# Altium PCB TurboSpin.PcbDoc (part 3 of 3)
Units mm, origin at the board's own origin, x right, y up, seen from the top; angles counter-clockwise.
Board outline 70.29 x 70.31 mm, 4 copper layers (Top Layer, GND, Power, Bottom Layer), stack 0.603 mm thick; 151 components, 101 nets, 536 pads, 784 vias.
Unrouted connection lines stored in the file: 8.
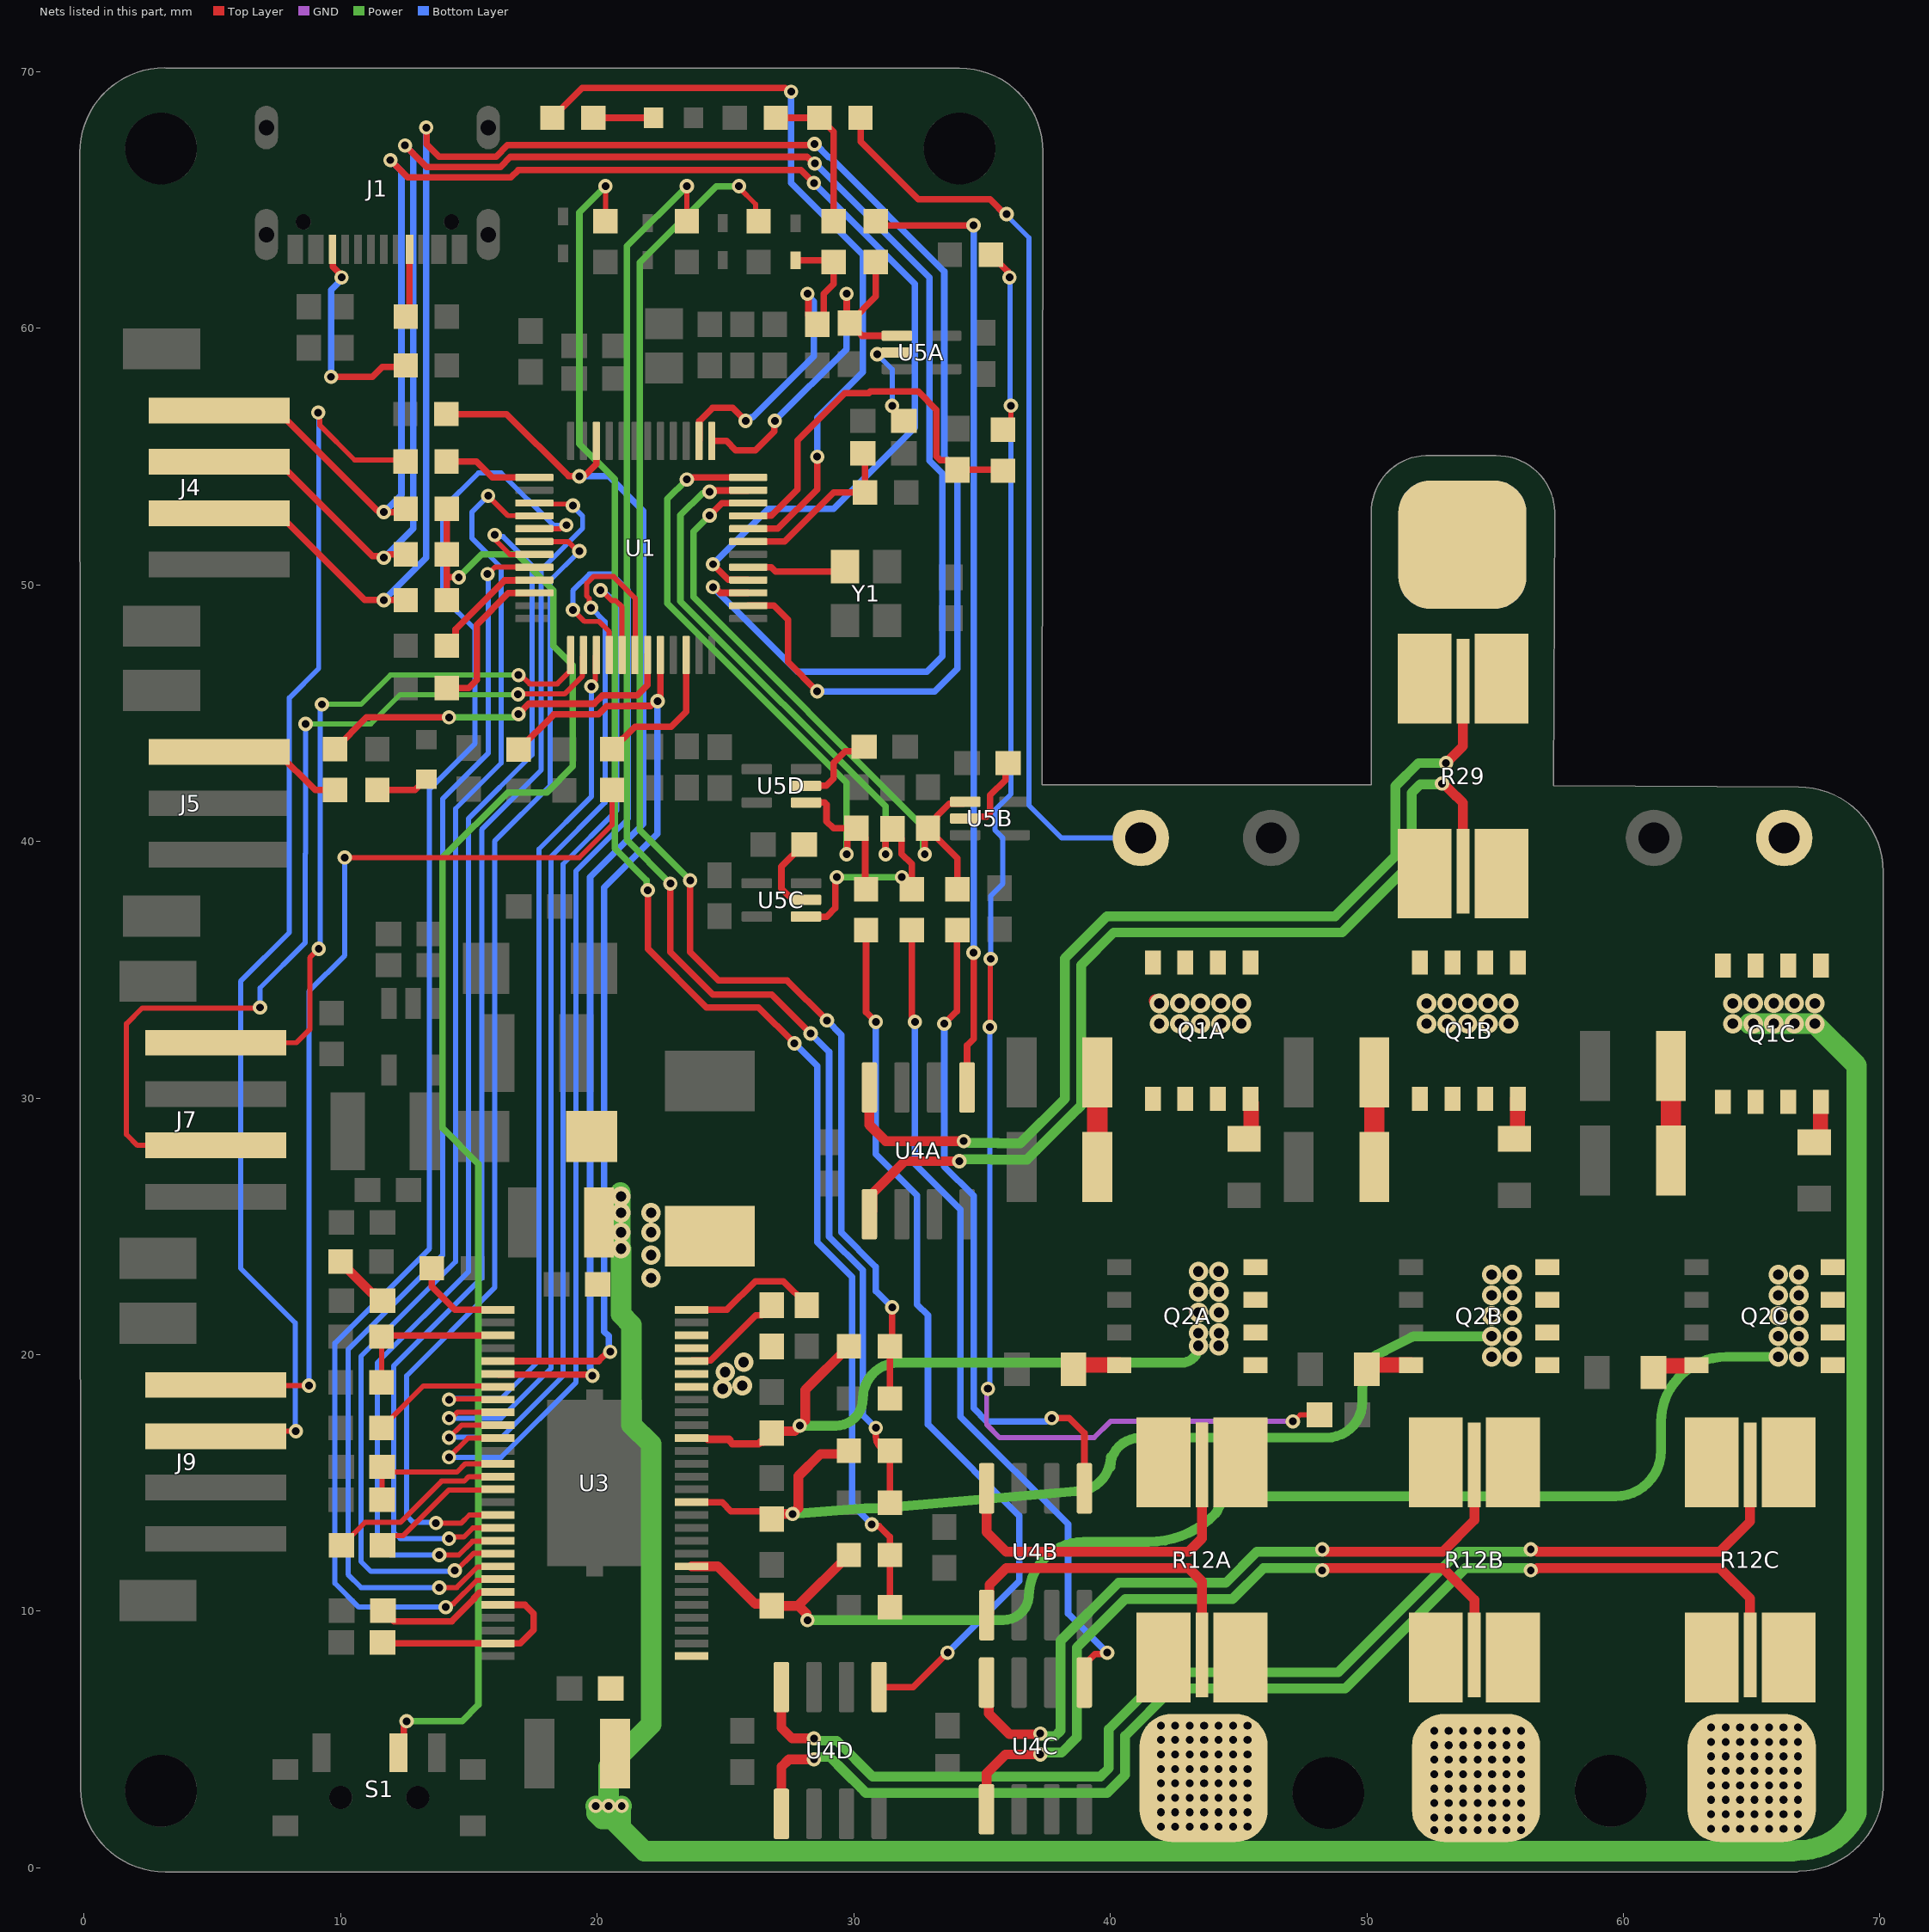
[diagram p4: the nets of this part, all layers, seen from the top]

## Via types
v1: diameter 0.559, hole 0.305, Top Layer to Bottom Layer, tented both sides, 440 vias
v2: diameter 0.56, hole 0.3, Top Layer to Bottom Layer, tented both sides, 254 vias
v3: diameter 0.762, hole 0.406, Top Layer to Bottom Layer, tented both sides, 72 vias
v4: diameter 0.508, hole 0.305, Top Layer to Bottom Layer, tented both sides, 18 vias

## Nets (pads, with @x,y where several pads share a name; then routed paths per layer and width w, separated by ;. In a path a pad name is that pad's centre, name@x,y a point inside that pad or via, vN(x,y) a via of type N, cw(c..) or ccw(c..) an arc to the next point about the centre after c; other vN are vias at no path point) (continued)
HALL_A: J4.2 R5.2 U1.2 | length 77.6
  Top Layer w0.254: J4.2@5.271,52.791 5.644,52.418 7.918,52.418 10.933,49.403 v2(11.684,49.403) R5.2@12.535,49.403 ; v2(13.335,67.818) 13.347,67.806 13.347,67.171 13.829,66.689 16.057,66.689 16.501,67.133 28.426,67.133 v2(28.469,67.177) ; U1.2@25.887,49.185 26.888,49.185 27.432,48.641 27.432,46.99 v2(28.575,45.847)
  Bottom Layer w0.254: v2(11.684,49.403) 13.335,51.054 v2(13.335,67.818) ; v2(28.469,67.177) 28.512,67.177 29.02,66.668 29.076,66.668 33.528,62.216 33.528,54.991 34.036,54.483 34.036,46.736 33.147,45.847 v2(28.575,45.847)
HALL_B: J4.3 R6.2 U1.3 | length 75.4
  Top Layer w0.254: J4.3@5.271,54.791 5.644,54.418 7.936,54.418 11.241,51.113 11.625,51.113 v2(11.684,51.054) ; v2@11.684,51.181 R6.2@12.535,51.181 ; v2(12.509,67.12) 13.346,66.283 16.225,66.283 16.617,66.675 28.177,66.675 28.433,66.419 v2(28.479,66.419) ; v2(24.511,49.911) 24.575,49.911 24.801,49.685 U1.3@25.887,49.685
  Bottom Layer w0.254: v2(11.684,51.054) 12.827,52.197 12.827,66.802 v2(12.509,67.12) ; v2(24.511,49.911) 27.813,46.609 32.846,46.609 33.452,47.215 33.452,54.338 32.952,54.839 32.952,61.975 28.508,66.419 v2(28.479,66.419)
HALL_C: J4.4 R7.2 U1.4 | length 63.1
  Top Layer w0.254: J4.4@5.271,56.791 7.521,56.791 11.421,52.891 11.625,52.891 v2(11.684,52.832) 12.408,52.832 R7.2@12.535,52.959 ; v2(11.938,66.548) 12.609,65.877 16.637,65.877 16.927,66.167 27.94,66.167 v2(28.448,65.659) ; v2(24.511,50.8) 25.113,50.198 25.874,50.198 U1.4@25.887,50.185
  Bottom Layer w0.254: v2(11.684,52.832) 12.37,53.518 12.37,66.116 v2(11.938,66.548) ; v2(24.511,50.8) 26.67,52.959 29.21,52.959 32.385,56.134 32.385,61.722 v2(28.448,65.659)
INA_N: C14A.2 C14B.2 C14C.2 C15A.2 C15B.2 C15C.2 C19.2 C20.2 C32.2 C33.2 C42.1 C43.1 Q1A.5 Q1A.6 Q1A.7 Q1A.8 Q1B.5 Q1B.6 Q1B.7 Q1B.8 Q1C.5 Q1C.6 Q1C.7 Q1C.8 R22A.1 R29.1 U3.29 U3.53 U3.54 U4A.1 | length 196.7
  Top Layer w0.254: R22A.1@30.264,68.199 30.264,67.272 32.512,65.024 35.306,65.024 35.941,64.389 35.957,64.405 v2(35.957,64.445)
  Top Layer w0.381: U4A.1@30.607,25.47 30.716,25.579 30.716,26.265 31.991,27.539 v2(34.116,27.539) ; v2(52.926,42.255) 52.975,42.255 53.456,41.774 53.476,41.774 53.745,41.505 R29.1@53.745,38.845
  Top Layer w0.5: v3@41.747,33.782 41.842,33.686 v3(41.91,33.686)
  Top Layer w0.8: C14A.2@39.492,27.312 C15A.2@39.492,30.995 ; C14B.2@50.292,27.114 C15B.2@50.292,30.797 ; C14C.2@61.849,27.495 C15C.2@61.849,31.178
  Power w0.381: v2(34.116,27.539) 34.15,27.573 34.277,27.573 34.318,27.614 35.353,27.614 35.371,27.597 36.75,27.597 37.122,27.968 38.49,29.337 38.862,29.709 38.862,35.179 40.132,36.449 49.031,36.449 51.748,39.166 51.748,41.89 52.078,42.221 52.892,42.221 v2(52.926,42.255)
  Power w0.8: v2(19.939,2.413) 19.973,2.379 19.973,2.128 20.196,1.905 20.574,1.905 ; v3@20.903,24.13 20.903,24.765 20.903,25.527 v3@20.903,26.323 ; v3(20.925,24.13) 20.925,21.568 21.336,21.157 21.336,17.272 22.098,16.51 22.098,5.588 20.447,3.937 v2(20.447,2.413) 20.481,2.379 20.481,1.998 20.574,1.905 ; v2(20.955,2.413) 20.921,2.379 20.921,1.905 20.921,1.617 20.892,1.587 ; v3@64.9,32.893 v3(67.462,32.893) 69.088,31.267 69.088,2.131 cw(c66.827,3.165) 66.807,0.679 ccw(c66.802,0) 66.583,0.643 21.836,0.643 21.293,1.186 20.892,1.587 ; 20.574,1.905 20.892,1.587
  Bottom Layer w0.2: v2@35.991,64.363 36.83,63.523 36.83,41.402 38.097,40.135 C42.1@41.188,40.135
  other v3: 20.925,24.765 20.925,25.527 20.925,26.162 41.91,32.893 42.71,32.893 43.51,32.893 44.31,32.893 45.11,32.893 52.324,32.893 53.124,32.893 53.924,32.893 54.724,32.893 55.524,32.893 64.262,32.893 65.062,32.893 65.862,32.893 66.662,32.893 42.71,33.693 43.51,33.693 44.31,33.693 45.11,33.686 52.324,33.686 53.124,33.693 53.924,33.693 54.724,33.693 55.524,33.686 64.262,33.686 65.062,33.693 65.862,33.693 66.662,33.693 67.462,33.686
INA_P: J2.1 R29.2 U4A.8 | length 38.6
  Top Layer w0.381: U4A.8@30.607,30.41 30.607,28.956 31.242,28.321 v2(34.29,28.321) ; v2(53.086,43.053) 53.745,43.712 R29.2@53.745,46.245
  Power w0.381: v2(34.29,28.321) 34.324,28.287 34.451,28.287 34.488,28.249 35.616,28.249 35.634,28.232 36.487,28.232 38.227,29.972 38.227,35.442 39.869,37.084 48.768,37.084 51.113,39.429 51.113,42.153 52.013,43.053 v2(53.086,43.053)
INB_N: J6.1 R12A.1 U4B.1 | length 12.9
  Top Layer w0.381: U4B.1@35.179,9.849 35.287,9.957 35.287,11.028 35.941,11.682 43.053,11.682 43.572,11.164 R12A.1@43.572,8.3
  other v1: 41.966,1.601 42.529,1.601 43.093,1.601 43.656,1.601 44.22,1.601 44.783,1.601 45.347,1.601 41.966,2.165 42.529,2.165 43.093,2.165 43.656,2.165 44.22,2.165 44.783,2.165 45.347,2.165 41.966,2.728 42.529,2.728 43.093,2.728 43.656,2.728 44.22,2.728 44.783,2.728 45.347,2.728 41.966,3.292 42.529,3.292 43.093,3.292 43.656,3.292 44.22,3.292 44.783,3.292 45.347,3.292 41.966,3.855 42.529,3.855 43.093,3.855 43.656,3.855 44.22,3.855 44.783,3.855 45.347,3.855 41.966,4.419 42.529,4.419 43.093,4.419 43.656,4.419 44.22,4.419 44.783,4.419 45.347,4.419 41.966,4.982 42.529,4.982 43.093,4.982 43.656,4.982 44.22,4.982 44.783,4.982 45.347,4.982 41.966,5.546 42.529,5.546 43.093,5.546 43.656,5.546 44.22,5.546 44.783,5.546 45.347,5.546
INB_P: C24.2 Q1A.1 Q1A.2 Q1A.3 Q2A.5 Q2A.6 Q2A.7 Q2A.8 R12A.2 R22D.1 U3.46 U4B.8 | length 39.3
  Top Layer w0.254: 25.172,16.663 25.172,16.611 25.26,16.523
  Top Layer w0.3: U3.46@23.679,16.748 24.267,16.748 24.312,16.703 25.133,16.703 25.172,16.663 ; 25.26,16.523 26.296,16.523 26.366,16.592 26.472,16.592 26.797,16.917 C24.2@26.797,16.942
  Top Layer w0.381: C24.2@26.797,16.942 26.873,17.018 27.686,17.018 v2(27.895,17.227) 28.105,17.437 28.105,18.618 R22D.1@29.807,20.32 ; U4B.8@35.179,14.789 35.179,13.079 35.941,12.317 43.053,12.317 43.572,12.836 R12A.2@43.572,15.7
  Power w0.381: v2(27.895,17.227) 29.292,17.227 ccw(c29.292,18.288) 30.353,18.288 cw(c31.75,18.288) 31.75,19.685 42.778,19.685 ccw(c42.778,20.341) v3(43.434,20.341)
  other v3: 44.227,20.341 43.434,20.841 44.234,20.841 43.434,21.641 44.234,21.641 43.434,22.441 44.234,22.441 43.434,23.241 44.227,23.241
INC_N: J8.1 R12B.1 U4C.1 | length 28.5
  Top Layer w0.381: U4C.1@35.176,2.281 35.176,3.68 35.916,4.42 v2(37.272,4.42) ; v2(48.26,11.593) 48.308,11.593 48.398,11.682 52.959,11.682 54.191,10.451 R12B.1@54.191,8.3
  Power w0.381: v2(37.272,4.42) 37.306,4.454 37.433,4.454 37.468,4.49 38.099,4.49 38.695,5.085 38.695,8.587 40.581,10.473 44.763,10.473 45.972,11.682 48.122,11.682 48.212,11.593 v2(48.26,11.593)
  other v1: 52.626,1.474 53.19,1.474 53.753,1.474 54.317,1.474 54.88,1.474 55.444,1.474 56.007,1.474 52.626,1.96 53.19,1.96 53.753,1.96 54.317,1.96 54.88,1.96 55.443,1.96 56.007,1.96 52.626,2.524 53.189,2.524 53.753,2.524 54.316,2.524 54.88,2.524 55.443,2.524 56.007,2.524 52.626,3.087 53.189,3.087 53.753,3.087 54.316,3.087 54.88,3.087 55.443,3.087 56.007,3.087 52.626,3.651 53.189,3.651 53.753,3.651 54.316,3.651 54.88,3.651 55.443,3.651 56.007,3.651 52.626,4.214 53.189,4.214 53.753,4.214 54.316,4.214 54.88,4.214 55.443,4.214 56.007,4.214 52.626,4.778 53.189,4.778 53.753,4.778 54.316,4.778 54.88,4.778 55.443,4.778 56.007,4.778 52.626,5.341 53.189,5.341 53.753,5.341 54.316,5.341 54.88,5.341 55.443,5.341 56.007,5.341
INC_P: C27.2 Q1B.1 Q1B.2 Q1B.3 Q2B.5 Q2B.6 Q2B.7 Q2B.8 R12B.2 R22C.1 U3.41 U4C.8 | length 68.2
  Top Layer w0.254: U3.41@23.679,14.248 24.868,14.248 25.217,13.899 26.512,13.899 26.797,13.614 C27.2@26.797,13.589 C27.2@26.998,13.79 ; R22C.1@29.68,16.129 R22C.1@29.807,16.256
  Top Layer w0.381: C27.2@26.998,13.79 v2(27.618,13.79) 27.841,14.013 27.841,15.268 28.702,16.129 R22C.1@29.68,16.129 ; U4C.8@35.168,7.213 35.259,7.122 35.259,6.016 36.068,5.207 37.245,5.207 v2(37.272,5.234) ; v2(48.26,12.407) 48.308,12.407 48.398,12.317 52.959,12.317 54.191,13.549 R12B.2@54.191,15.7
  Power w0.381: v2(27.618,13.79) 30.446,14.005 30.953,14.005 38.632,14.669 38.733,14.674 ccw(c38.67,16.013) 40.01,16.013 ; v2(37.272,5.234) 37.32,5.234 37.429,5.125 37.836,5.125 38.06,5.348 38.06,8.85 40.318,11.108 44.5,11.108 45.709,12.317 48.122,12.317 48.212,12.407 v2(48.26,12.407) ; 40.005,15.621 cw(c41.133,15.621) 41.133,16.749 41.293,16.749 ; 41.139,16.724 cw(c41.529,14.859) 41.293,16.749 ; 51.829,20.714 52.197,20.714 ; v3(54.864,20.714) 52.197,20.714 ; 41.293,16.749 cw(c41.529,14.859) 41.529,16.764 48.429,16.764 ccw(c48.429,18.156) 49.821,18.156 49.821,18.632 cw(c51.904,18.632) 50.237,19.88 cw(c50.541,19.651) 50.379,19.996 50.682,20.138 ccw(c50.417,20.701) 50.699,20.147 51.731,20.672 cw(c51.904,20.333) 51.904,20.714 52.197,20.714
  other v3: 54.864,19.914 55.657,19.914 55.664,20.714 54.864,21.514 55.664,21.514 54.864,22.314 55.664,22.314 54.864,23.114 55.657,23.114
IND_N: J10.1 R12C.1 U4D.1 | length 47.6
  Top Layer w0.381: U4D.1@27.178,2.102 27.178,3.937 27.47,4.229 v2(28.448,4.229) ; v2(56.388,11.593) 56.422,11.627 56.587,11.627 56.642,11.682 63.754,11.682 64.936,10.5 R12C.1@64.936,8.3
  Power w0.381: v2(28.448,4.229) 28.537,4.318 29.074,4.318 29.65,3.742 30.285,3.107 30.471,2.921 39.878,2.921 40.576,3.62 40.576,5.143 42.418,6.985 49.149,6.985 53.846,11.682 56.25,11.682 56.34,11.593 v2(56.388,11.593)
  other v1: 63.421,1.524 63.985,1.524 64.548,1.524 65.112,1.524 65.675,1.524 66.239,1.524 66.802,1.524 63.421,2.087 63.985,2.087 64.548,2.087 65.112,2.087 65.675,2.087 66.238,2.087 66.802,2.087 63.421,2.651 63.984,2.651 64.548,2.651 65.111,2.651 65.675,2.651 66.238,2.651 66.802,2.651 63.421,3.214 63.984,3.214 64.548,3.214 65.111,3.214 65.675,3.214 66.238,3.214 66.802,3.214 63.421,3.778 63.984,3.778 64.548,3.778 65.111,3.778 65.675,3.778 66.238,3.778 66.802,3.778 63.421,4.341 63.984,4.341 64.548,4.341 65.111,4.341 65.675,4.341 66.238,4.341 66.802,4.341 63.421,4.905 63.984,4.905 64.548,4.905 65.111,4.905 65.675,4.905 66.238,4.905 66.802,4.905 63.421,5.468 63.984,5.468 64.548,5.468 65.111,5.468 65.675,5.468 66.238,5.468 66.802,5.468
IND_P: C29.2 Q1C.1 Q1C.2 Q1C.3 Q2C.5 Q2C.6 Q2C.7 Q2C.8 R12C.2 R22B.1 U3.36 U4D.8 | length 99.4
  Top Layer w0.381: U3.36@23.679,11.748 24.701,11.748 26.162,10.287 26.721,10.287 C29.2@26.797,10.211 27.826,10.211 R22B.1@29.807,12.192 ; U4D.8@27.178,7.042 27.178,5.461 27.597,5.042 v2(28.448,5.042) ; 27.836,10.221 28.16,9.898 28.16,9.686 v2(28.194,9.652) ; v2(56.388,12.407) 56.422,12.373 56.587,12.373 56.642,12.317 63.754,12.317 64.936,13.5 R12C.2@64.936,15.7
  Power w0.381: v2(28.194,9.652) 35.814,9.652 ccw(c35.814,10.668) 36.825,10.566 cw(c38.959,10.566) 38.959,12.7 41.479,12.7 41.486,12.7 ccw(c41.478,16.355) 44.092,13.8 ccw(c43.819,14.066) 44.174,13.929 44.203,14.002 cw(c44.558,13.866) 44.275,14.121 cw(c44.586,13.84) 44.278,14.124 cw(c45.085,13.381) 45.085,14.478 59.69,14.478 ccw(c59.69,16.256) 61.468,16.256 61.468,17.374 cw(c64.008,17.374) 64.008,19.914 v3(66.04,19.914) ; v2(28.448,5.042) 28.537,4.953 29.337,4.953 30.734,3.556 39.615,3.556 39.941,3.883 39.941,5.407 42.155,7.62 48.886,7.62 53.583,12.317 56.25,12.317 56.34,12.407 v2(56.388,12.407)
  other v3: 66.833,19.914 66.04,20.714 66.84,20.714 66.04,21.514 66.84,21.514 66.04,22.314 66.84,22.314 66.04,23.114 66.833,23.114
INH_A: U1.30 U3.17 | length 46.1
  Top Layer w0.2: v2(13.716,13.438) 13.719,13.435 14.705,13.435 15.018,13.748 U3.17@16.129,13.748 ; U1.30@17.547,51.685 18.861,51.685 19.238,51.308 v2(19.304,51.308)
  Bottom Layer w0.2: v2(13.716,13.438) 13.692,13.462 12.827,13.462 12.573,13.716 12.573,19.177 16.002,22.606 16.002,40.005 18.166,42.169 18.166,50.17 v2(19.304,51.308)
INH_B: U1.31 U3.19 | length 49.6
  Top Layer w0.2: v2(13.843,12.192) 14.605,12.192 15.136,12.723 16.104,12.723 U3.19@16.129,12.748 ; v2(16.002,51.943) 16.071,51.874 16.071,51.705 16.592,51.184 U1.31@17.546,51.184
  Bottom Layer w0.2: v2(13.843,12.192) 11.938,12.192 11.43,12.7 11.43,19.685 14.986,23.241 14.986,40.894 17.462,43.37 17.462,50.747 16.335,51.874 16.071,51.874 v2(16.002,51.943)
INH_C: U1.32 U3.21 | length 49.6
  Top Layer w0.2: v2(13.843,10.922) 14.526,10.922 15.328,11.724 16.079,11.724 U3.21@16.116,11.761 ; v2(15.724,50.419) 15.744,50.419 16.021,50.696 U1.32@17.536,50.696
  Bottom Layer w0.2: v2(13.843,10.922) 10.795,10.922 10.287,11.43 10.287,20.193 13.97,23.876 13.97,41.656 15.748,43.434 15.748,50.395 v2(15.724,50.419)
INL_A: U1.27 U3.18 | length 49.1
  Top Layer w0.2: v2(14.224,12.827) 14.293,12.896 14.801,12.896 15.153,13.248 U3.18@16.129,13.248 ; U1.27@17.547,53.185 17.587,53.145 18.991,53.145 v2(19.05,53.086)
  Bottom Layer w0.2: v2(14.224,12.827) 12.319,12.827 12.065,13.081 12.065,19.558 15.494,22.987 15.494,40.457 17.814,42.777 17.814,50.58 19.431,52.197 19.431,52.682 19.05,53.063 v2(19.05,53.086)
INL_B: U1.28 U3.20 | length 52.4
  Top Layer w0.2: v2(14.443,11.592) 14.513,11.592 15.176,12.255 U3.20@16.122,12.255 ; v2(15.748,53.467) 16.521,52.694 U1.28@17.538,52.694
  Bottom Layer w0.2: v2(14.443,11.592) 14.408,11.557 11.176,11.557 10.795,11.938 10.795,19.939 14.478,23.622 14.478,41.275 16.256,43.053 16.256,50.673 15.113,51.816 15.113,52.832 v2(15.748,53.467)
INL_C: U1.29 U3.22 | length 59.4
  Top Layer w0.2: v2(14.097,10.16) 14.194,10.16 14.322,10.288 14.389,10.288 15.3,11.198 16.079,11.198 U3.22@16.129,11.248 ; U1.29@17.547,52.185 18.56,52.185 18.699,52.324 v2(18.796,52.324)
  Bottom Layer w0.2: v2(14.097,10.16) 10.704,10.16 9.779,11.085 9.779,20.447 13.462,24.13 13.462,42.037 15.24,43.815 15.24,48.26 13.97,49.53 13.97,52.959 15.367,54.356 16.256,54.356 18.288,52.324 v2(18.796,52.324)
LED: R31.2 U1.8 | length 30.4
  Top Layer w0.254: R31.2@18.25,68.199 19.416,69.365 27.326,69.365 27.476,69.215 v2(27.559,69.215) ; U1.8@25.887,52.185 27.039,52.185 28.575,53.721 v2@28.575,54.864
  Bottom Layer w0.254: v2(27.559,69.215) 27.559,65.659 30.353,62.865 30.353,58.293 28.575,56.515 v2(28.575,54.991)
NetC13_2: C13.2 R10.2 U1.9 | length 15.4
  Top Layer w0.254: U1.9@25.887,52.685 25.9,52.698 26.79,52.698 27.813,53.721 27.813,55.626 29.654,57.467 30.581,57.467 30.645,57.531 32.512,57.531 33.222,56.821 33.222,55.005 33.37,54.856 33.688,54.856 34.036,54.508 C13.2@34.036,54.483 35.776,54.483 R10.2@35.814,54.445
NetC17_2: C17.2 R15.2 | length 2.3
  Top Layer w0.381: R15.2@9.995,23.622 11.235,22.383 11.348,22.383 C17.2@11.633,22.098
NetC18_2: C18.2 U3.56 | length 5.4
  Top Layer w0.254: U3.56@23.679,21.748 25.05,21.748 26.162,22.86 27.257,22.86 28.168,21.949 C18.2@28.168,21.924
NetC21_1: C21.1 U3.52 | length 4
  Top Layer w0.254: U3.52@23.679,19.748 23.702,19.771 24.428,19.771 26.187,21.531 26.422,21.531 26.797,21.906 C21.1@26.797,21.92
NetC21_2: C21.2 D2.2 L1.1 U3.50 U3.51 | length 0.1
  Top Layer w0.2: U3.51@23.679,19.248 U3.51@23.729,19.298
  other v3: 24.892,18.669 25.654,18.796 24.99,19.319 25.71,19.707 22.098,22.987 22.098,23.876 22.098,24.765 22.098,25.527
NetC25_2: C25.2 C26.2 U3.13 | length 6
  Top Layer w0.2: C25.2@11.617,14.343 11.621,14.347 C26.2@11.621,15.626 11.827,15.419 14.53,15.419 14.859,15.748 U3.13@16.129,15.748
NetC28_1: C28.1 U3.14 | length 7.2
  Top Layer w0.2: C28.1@10.033,12.573 10.058,12.573 10.947,13.462 12.329,13.462 13.934,15.067 14.813,15.067 14.994,15.248 U3.14@16.129,15.248
NetC28_2: C28.2 U3.15 | length 5.4
  Top Layer w0.2: C28.2@11.633,12.573 12.008,12.948 12.44,12.948 14.207,14.715 16.096,14.715 U3.15@16.129,14.748
NetC30_2: C30.2 U3.23 | length 5.2
  Top Layer w0.254: C30.2@11.643,10.017 11.668,10.017 12.084,9.601 14.329,9.601 15.2,10.472 15.2,10.514 15.411,10.725 16.106,10.725 U3.23@16.129,10.748
NetC36A_1: C36A.1 R21A.2 U1.13 U5A.1 | length 15.4
  Top Layer w0.254: U1.13@24.467,55.605 25.04,55.605 25.4,55.245 26.162,55.245 26.901,55.984 26.901,56.365 v2(26.924,56.388) ; v2(29.718,61.341) 29.724,61.335 29.724,60.319 C36A.1@29.845,60.198 ; C36A.1@29.845,60.173 30.313,59.705 U5A.1@31.679,59.705 ; C36A.1@29.845,60.223 30.861,61.239 R21A.2@30.861,62.573
  Bottom Layer w0.254: v2(26.924,56.388) 29.718,59.182 v2(29.718,61.341)
NetC36B_1: C36B.1 R21B.2 U1.10 U5B.1 | length 24.8
  Top Layer w0.254: v2(24.384,52.705) 24.864,53.185 U1.10@25.887,53.185 ; v2(32.766,39.497) 32.766,40.386 C36B.1@32.893,40.513 33.241,40.861 33.241,40.988 33.724,41.471 34.273,41.471 U5B.1@34.346,41.544 ; C36B.1@32.893,40.488 34.036,39.345 R21B.2@34.036,38.138
  Power w0.254: v2(24.384,52.705) 23.749,52.07 23.749,49.53 32.707,40.572 32.707,39.556 v2(32.766,39.497)
NetC36C_1: C36C.1 R21C.2 U1.11 U5C.1 | length 28.4
  Top Layer w0.254: v2(24.384,53.622) 24.434,53.672 25.874,53.672 U1.11@25.887,53.685 ; U5C.1@28.138,37.069 28.941,37.069 29.278,37.406 29.278,38.549 v2(29.337,38.608) ; v2(31.242,39.497) 31.242,40.211 C36C.1@31.514,40.483 31.862,40.135 31.862,39.512 32.258,39.116 R21C.2@32.258,38.138
  Power w0.254: v2(24.384,53.622) 24.325,53.563 24.099,53.563 23.241,52.705 23.241,49.367 31.242,41.366 v2(31.242,39.497) ; v2(29.337,38.608) v2(31.877,38.608)
NetC36D_1: C36D.1 R21D.2 U1.12 U5D.1 | length 26.3
  Top Layer w0.254: v2(23.495,54.102) 23.578,54.102 23.656,54.181 U1.12@25.883,54.181 ; U5D.1@28.519,41.514 28.864,41.514 28.937,41.441 28.937,40.786 29.21,40.513 C36D.1@30.099,40.513 ; v2(29.718,39.497) 29.751,39.53 29.751,40.165 C36D.1@30.099,40.513 ; R21D.2@30.48,38.138 30.447,38.171 30.447,40.165 C36D.1@30.099,40.513
  Power w0.254: v2(23.495,54.102) 22.733,53.34 22.733,49.276 29.718,42.291 v2(29.718,39.497)
NetC38A_1: C38A.1 U5A.2 | length 3.8
  Top Layer w0.2: v2(30.912,58.983) 30.948,59.019 31.643,59.019 U5A.2@31.679,59.055 ; v2(31.496,56.972) 31.553,56.915 31.553,56.763 31.928,56.388 C38A.1@31.953,56.388
  Bottom Layer w0.2: v2(30.912,58.983) 31.496,58.399 v2(31.496,56.972)
NetC38B_1: C38B.1 U5B.2 | length 3.3
  Top Layer w0.254: U5B.2@34.346,40.894 34.419,40.967 35.171,40.967 35.32,41.116 35.32,41.797 35.918,42.395 35.918,42.954 C38B.1@36.017,43.053
NetC38C_1: C38C.1 U5C.2 | length 3.3
  Top Layer w0.254: C38C.1@28.092,39.878 C38C.1@28.067,39.878 28.042,39.878 27.178,39.014 27.178,38.169 27.457,37.89 27.572,37.89 27.743,37.719 U5C.2@28.138,37.719
NetC38D_1: C38D.1 U5D.2 | length 3.2
  Top Layer w0.254: U5D.2@28.138,42.164 28.145,42.171 28.928,42.171 29.21,42.453 29.21,43.053 29.672,43.515 30.231,43.515 C38D.1@30.404,43.688
NetJ1_A5: J1.A5 R25.1 | length 2.7
  Top Layer w0.254: R25.1@12.535,60.452 12.674,60.591 J1.A5@12.674,63.062
NetJ1_B5: J1.B5 R28.1 | length 8.4
  Top Layer w0.254: v2(9.626,58.104) 11.241,58.104 11.624,58.487 12.475,58.487 R28.1@12.535,58.547 ; J1.B5@9.68,63.068 9.703,63.045 9.703,62.389 10.033,62.059 v2(10.033,61.976)
  Bottom Layer w0.254: v2(9.626,58.104) 9.626,61.486 10.033,61.893 v2(10.033,61.976)
NetJ5_3: J5.3 R32.1 | length 5.1
  Top Layer w0.254: J5.3@5.27,43.484 7.52,43.484 9.005,41.999 R32.1@9.779,41.999
NetJ9_3: J9.3 R2.2 | length 49.5
  Top Layer w0.2: J9.3@5.126,16.818 5.326,17.018 v2(8.255,17.018) ; v2(9.124,56.711) 9.193,56.642 9.193,56.212 10.541,54.864 12.473,54.864 R2.2@12.527,54.81
  Bottom Layer w0.2: v2(8.255,17.018) 8.231,17.042 8.231,21.233 6.096,23.368 6.096,34.544 8.001,36.449 8.001,45.593 9.144,46.736 9.144,56.692 v2(9.124,56.711)
NetJ9_4: J9.4 R3.2 | length 37.1
  Top Layer w0.2: J9.4@5.126,18.818 5.148,18.796 v2(8.763,18.796) ; v2(10.16,39.37) 19.304,39.37 20.576,40.642 R3.2@20.576,42.001
  Bottom Layer w0.2: v2(8.763,18.796) 8.763,34.163 10.16,35.56 v2(10.16,39.37)
NetLD1_2: LD1.2 R30.1 | length 2.1
  Top Layer w0.254: R30.1@11.43,41.999 12.891,41.999 13.31,42.418 LD1.2@13.335,42.418
NetLD2_2: LD2.2 R31.1 | length 2.3
  Top Layer w0.254: R31.1@19.85,68.199 LD2.2@22.199,68.199
NetQ1A_4: Q1A.4 R11A.2 | length 1.7
  Top Layer w0.6: R11A.2@45.212,28.405 45.287,28.405 45.487,28.605 45.487,29.791 45.476,29.802 Q1A.4@45.476,29.951
NetQ1B_4: Q1B.4 R11B.2 | length 1.6
  Top Layer w0.6: R11B.2@55.753,28.405 55.87,28.522 55.87,29.962 Q1B.4@55.88,29.972
NetQ1C_4: Q1C.4 R11C.2 | length 1.7
  Top Layer w0.6: R11C.2@67.437,28.278 67.481,28.278 67.681,28.478 67.681,29.835 Q1C.4@67.691,29.845
NetQ2A_4: Q2A.4 R13A.2 | length 1.8
  Top Layer w0.254: R13A.2@38.565,19.431 R13A.2@38.729,19.595
  Top Layer w0.6: R13A.2@38.729,19.595 Q2A.4@40.345,19.595
NetQ2B_4: Q2B.4 R13B.2 | length 1.8
  Top Layer w0.38: R13B.2@49.995,19.431 R13B.2@50.159,19.595
  Top Layer w0.6: R13B.2@50.159,19.595 Q2B.4@51.726,19.595
NetQ2C_4: Q2C.4 R13C.2 | length 1.8
  Top Layer w0.38: Q2C.4@62.484,19.558 62.816,19.558 Q2C.4@62.853,19.595
  Top Layer w0.6: R13C.2@61.171,19.304 61.171,19.358 61.371,19.558 Q2C.4@62.484,19.558
NetR5_1: R5.1 R6.1 R7.1 S1.2 | length 60.4
  Top Layer w0.254: S1.2@12.25,4.488 12.456,4.694 12.456,5.515 12.573,5.632 v2(12.573,5.715) ; R5.1@14.135,49.403 14.135,50.292 ; R7.1@14.135,52.959 R6.1@14.135,51.181 14.135,50.292 ; v2(14.605,50.292) 14.135,50.292
  Power w0.254: v2(12.573,5.715) 14.732,5.715 15.367,6.35 15.367,27.432 13.97,28.829 13.97,39.37 16.51,41.91 18.034,41.91 19.05,42.926 19.05,46.863 18.288,47.625 18.288,49.784 16.891,51.181 15.494,51.181 v2(14.605,50.292)
NetR9_2: R9.2 R10.1 RT1.2 | length 61.2
  Top Layer w0.2: v2(35.306,32.766) 35.323,32.783 35.323,35.403 v2(35.341,35.42) ; R10.1@35.814,56.045 36.126,56.357 v2(36.126,56.979) ; v1(47.117,17.399) 47.146,17.399 47.4,17.653 RT1.2@48.16,17.653
  Top Layer w0.254: R9.2@35.344,62.865 36.009,62.2 36.009,62.035 v2(36.068,61.976)
  GND w0.2: v1(35.229,18.669) 35.179,18.619 35.179,17.272 35.687,16.764 39.37,16.764 40.005,17.399 v1(47.117,17.399)
  Bottom Layer w0.2: v1(35.229,18.669) 35.298,18.738 35.298,18.958 35.306,18.966 v2(35.306,32.766) ; v2(35.341,35.42) 35.341,37.881 35.814,38.354 35.814,40.132 35.513,40.433 35.513,41.228 36.126,41.841 v2(36.126,56.979) 36.097,57.008 36.097,61.947 v2(36.068,61.976)
NetR17_2: R17.2 U3.1 | length 3.7
  Top Layer w0.254: R17.2@13.551,23.368 13.551,22.659 14.462,21.748 U3.1@16.129,21.748
NetR20_2: R20.2 U3.7 | length 5.2
  Top Layer w0.2: R20.2@11.595,17.145 11.97,17.52 11.97,17.526 13.222,18.779 16.098,18.779 U3.7@16.129,18.748
NetR21A_1: R21A.1 U4A.5 | length 37.6
  Top Layer w0.254: R21A.1@30.861,64.173 31.026,64.008 v2(34.671,64.008) ; U4A.5@34.417,30.41 34.417,32.048 34.671,32.302 v2(34.671,35.662)
  Bottom Layer w0.254: v2(34.671,35.662) v2(34.671,64.008)
NetR21B_1: R21B.1 U4B.5 | length 26.3
  Top Layer w0.254: v2(33.528,32.893) 34.021,33.386 R21B.1@34.021,36.523 ; v2(37.719,17.526) 38.398,17.526 38.989,16.935 U4B.5@38.989,14.789
  Bottom Layer w0.254: v2(33.528,32.893) 33.528,27.336 34.671,26.193 34.671,17.907 35.179,17.399 37.509,17.399 37.636,17.526 v2(37.719,17.526)
NetR21C_1: R21C.1 U4C.5 | length 33.1
  Top Layer w0.254: R21C.1@32.258,36.538 32.258,33.177 32.385,33.05 v2(32.385,32.967) ; U4C.5@38.986,7.221 38.986,7.906 39.404,8.323 39.819,8.323 v2(39.878,8.382)
  Bottom Layer w0.254: v2(32.385,32.967) 32.385,27.432 34.163,25.654 34.163,17.581 38.354,13.39 38.354,9.906 v2(39.878,8.382)
NetR21D_1: R21D.1 U4D.5 | length 35
  Top Layer w0.254: R21D.1@30.48,36.538 30.48,33.348 v2(30.861,32.967) ; U4D.5@30.988,7.042 32.315,7.042 v2(33.655,8.382)
  Bottom Layer w0.254: v2(30.861,32.967) 30.861,27.813 32.461,26.213 32.461,21.958 32.893,21.526 32.893,17.272 36.449,13.716 36.449,11.176 v2(33.655,8.382)
NetR22A_2: R22A.2 R23A.1 R24A.1 | length 6
  Top Layer w0.254: R24A.1@26.962,68.199 R22A.2@28.664,68.199 29.21,67.653 R23A.1@29.21,64.173
NetR22B_2: R22B.2 R23B.1 R24B.1 | length 63.5
  Top Layer w0.2: R23B.1@20.32,64.173 v2(20.32,65.532)
  Top Layer w0.254: v2(21.971,38.1) 21.971,35.814 24.257,33.528 26.289,33.528 v2(27.686,32.131) ; v2(30.704,13.382) 30.773,13.313 30.988,13.313 31.407,12.894 R24B.1@31.407,10.16
  Power w0.254: v2(20.32,65.532) 19.292,64.504 19.304,64.492 19.304,55.499 20.685,54.118 20.685,39.719 21.927,38.477 21.927,38.144 v2(21.971,38.1)
  Bottom Layer w0.254: v2(27.686,32.131) 28.575,31.242 28.575,24.384 29.932,23.027 29.932,14.154 v2(30.704,13.382)
NetR22C_2: R22C.2 R23C.1 R24C.1 | length 59.3
  Top Layer w0.2: R23C.1@23.495,64.173 v2(23.495,65.532)
  Top Layer w0.254: v2(22.852,38.356) 22.852,35.695 24.511,34.036 26.797,34.036 v2(28.321,32.512) ; v2(30.861,17.145) 30.861,16.802 ccw(c31.407,16.802) R22C.2@31.407,16.256 R24C.1@31.407,14.224
  Power w0.254: v2(22.852,38.356) 21.153,40.055 21.153,63.19 v2(23.495,65.532)
  Bottom Layer w0.254: v2(28.321,32.512) 29.038,31.795 29.038,24.603 30.353,23.287 30.353,17.653 v2(30.861,17.145)
NetR22D_2: R22D.2 R23D.1 R24D.1 | length 56.7
  Top Layer w0.2: v2(25.527,65.532) 25.527,65.476 26.173,64.831 26.173,64.311 R23D.1@26.3,64.184
  Top Layer w0.254: v2(23.622,38.481) 23.622,35.687 24.728,34.581 27.395,34.581 v2(28.956,33.02) ; R24D.1@31.407,18.288 R22D.2@31.407,20.32 31.496,20.409 v2(31.496,21.844)
  Power w0.254: v2(23.622,38.481) 21.661,40.442 21.661,62.555 24.638,65.532 v2(25.527,65.532)
  Bottom Layer w0.254: v2(28.956,33.02) 29.517,32.459 29.517,24.759 30.861,23.415 30.861,22.479 v2(31.496,21.844)
NetR26_2: R26.2 U1.34 | length 6.2
  Top Layer w0.254: R26.2@14.135,45.974 14.986,45.974 15.303,46.291 15.303,48.44 16.535,49.672 17.534,49.672 U1.34@17.547,49.685
NetR27_2: R27.2 U1.33 | length 4.6
  Top Layer w0.254: R27.2@14.135,47.625 14.479,47.969 14.479,48.261 16.39,50.172 17.534,50.172 U1.33@17.547,50.185
NetR32_2: R32.2 U1.43 | length 14.4
  Top Layer w0.254: R32.2@9.779,43.599 11.011,44.831 v2(14.224,44.831) ; v2(16.93,44.958) 17.336,45.364 19.888,45.364 20.21,45.685 21.555,45.685 21.967,46.097 U1.43@21.967,47.265
  Power w0.254: v2(14.224,44.831) 16.72,44.831 16.847,44.958 v2(16.93,44.958)
NFAULT: R18.1 U1.22 U3.6 | length 49.3
  Top Layer w0.254: R18.1@14.121,56.653 16.472,56.653 18.886,54.238 19.295,54.238 v2(19.304,54.229) 19.363,54.288 19.549,54.288 19.969,54.707 19.969,55.603 U1.22@19.967,55.605 ; U3.6@16.129,19.248 16.152,19.225 19.764,19.225 v2(19.812,19.177)
  Bottom Layer w0.254: v2(19.304,54.229) 20.447,54.229 21.793,52.883 21.793,40.677 19.722,38.607 19.722,19.479 19.753,19.448 19.753,19.236 v2(19.812,19.177)
NOCTW: R19.1 U1.44 U3.5 | length 38.9
  Top Layer w0.254: U3.5@16.129,19.748 20.058,19.748 20.421,20.111 v2(20.504,20.111) ; R19.1@16.938,43.578 18.317,44.958 20.057,44.958 20.373,45.274 21.166,45.274 21.171,45.279 22.082,45.279 22.269,45.466 v2(22.352,45.466) 22.352,45.549 22.467,45.664 U1.44@22.467,47.265
  Bottom Layer w0.254: v2(20.504,20.111) 20.445,20.17 20.445,20.719 20.265,20.899 20.265,38.206 22.352,40.293 v2(22.352,45.466)
NRST: C7.1 R4.2 U1.7 | length 6.9
  Top Layer w0.254: U1.7@25.887,51.685 27.301,51.685 29.21,53.594 R4.2@30.442,53.594 30.442,55.029 C7.1@30.353,55.118
OSC_IN: U1.5 Y1.3 | length 3.9
  Top Layer w0.254: U1.5@25.891,50.681 26.789,50.681 26.949,50.521 29.469,50.521 Y1.3@29.655,50.707
PVDD_S_M: C39A.2 D3A.1 R23A.2 U1.14 | length 14.8
  Top Layer w0.254: U1.14@23.967,55.605 23.98,55.618 23.98,56.377 24.499,56.896 25.273,56.896 v2(25.781,56.388) ; D3A.1@27.732,62.645 29.138,62.645 R23A.2@29.21,62.573 29.21,61.722 28.829,61.341 28.829,60.401 C39A.2@28.575,60.147 28.234,60.488 28.234,61.301 v2(28.194,61.341)
  Bottom Layer w0.254: v2(25.781,56.388) 25.864,56.388 26.003,56.527 26.069,56.527 28.448,58.906 28.448,61.039 28.194,61.293 v2(28.194,61.341)
REF: C31.2 U3.24 U3.27 | length 8.2
  Top Layer w0.254: C31.2@11.684,8.763 11.699,8.748 U3.27@16.129,8.748 17.003,8.748 17.526,9.271 17.526,9.906 17.184,10.248 U3.24@16.129,10.248
RX: R2.1 U1.25 | length 3.1
  Top Layer w0.254: R2.1@14.127,54.81 15.294,54.81 15.919,54.185 17,54.185 U1.25@17.01,54.196
SWCLK: J7.2 U1.38 | length 37.6
  Top Layer w0.2: J7.2@5.126,28.153 2.076,28.153 1.651,28.578 1.651,32.893 2.259,33.501 6.831,33.501 v2(6.858,33.528) ; v2(16.916,45.734) 16.924,45.743 18.725,45.743 19.427,46.445 19.427,47.203 U1.38@19.478,47.254
  Power w0.2: v2(8.636,44.577) 11.176,44.577 12.319,45.72 16.901,45.72 v2(16.916,45.734)
  Bottom Layer w0.2: v2(6.858,33.528) 6.858,34.29 8.612,36.044 8.612,39.517 8.636,39.541 v2(8.636,44.577)
SWDIO: J7.4 U1.37 | length 27.9
  Top Layer w0.2: J7.4@5.126,32.153 8.277,32.153 8.795,32.671 8.795,35.465 v2(9.144,35.814) ; v2(16.93,46.482) 17.027,46.482 17.369,46.14 18.447,46.14 18.967,46.66 U1.37@18.967,47.265 U1.37@18.946,47.244
  Power w0.2: v2(9.271,45.339) 10.795,45.339 11.938,46.482 v2(16.93,46.482)
  Bottom Layer w0.2: v2(9.144,35.814) 9.207,35.877 9.207,45.276 v2(9.271,45.339)
TX: R3.1 U1.46 | length 5.7
  Top Layer w0.254: R3.1@20.576,43.601 20.967,43.993 20.998,43.993 21.472,44.467 22.886,44.467 23.467,45.048 U1.46@23.467,47.265
VSENSE: R14.2 R16.1 U3.3 | length 6.3
  Top Layer w0.2: R16.1@11.595,18.923 R14.2@11.595,20.701
  Top Layer w0.254: R14.2@11.595,20.701 11.643,20.749 U3.3@16.129,20.748
WIRE10: U1.39 U3.8 | length 34.5
  Top Layer w0.2: v2(14.224,18.247) 14.245,18.268 16.109,18.268 U3.8@16.129,18.248 ; v2(19.774,46.04) 19.774,46.137 19.927,46.29 19.927,47.225 U1.39@19.967,47.265
  Bottom Layer w0.2: v2(14.224,18.247) 14.265,18.288 16.256,18.288 17.731,19.763 17.731,39.702 19.776,41.747 19.776,46.037 v2(19.774,46.04)
WIRE11: U1.40 U3.11 | length 46.2
  Top Layer w0.2: v2(14.224,16.002) 14.97,16.748 U3.11@16.129,16.748 ; v2(19.05,49.022) 19.5,48.572 20.068,48.572 20.459,48.181 U1.40@20.459,47.273
  Bottom Layer w0.2: v2(14.224,16.002) 16.256,16.002 19.177,18.923 19.177,38.853 21.209,40.885 21.209,49.784 20.574,50.419 19.695,50.419 19.05,49.774 v2(19.05,49.022)
WIRE12: U1.42 U3.9 | length 43.1
  Top Layer w0.2: v2(14.224,17.526) 14.321,17.526 14.543,17.748 U3.9@16.129,17.748 ; v2(19.76,49.104) 19.691,49.173 19.691,49.466 19.594,49.564 19.594,50.055 19.854,50.316 20.639,50.316 21.476,49.48 U1.42@21.476,47.274
  Bottom Layer w0.2: v2(14.224,17.526) 16.256,17.526 18.197,19.467 18.197,39.406 20.306,41.515 20.306,48.559 v2(19.76,49.104)
WIRE13: U1.41 U3.10 | length 42.4
  Top Layer w0.2: v2(14.224,16.764) 14.708,17.248 U3.10@16.129,17.248 ; v2(20.126,49.784) 20.162,49.784 20.554,49.392 20.712,49.392 20.967,49.137 U1.41@20.967,47.265
  Bottom Layer w0.2: v2(14.224,16.764) 14.244,16.784 16.282,16.784 18.669,19.17 18.669,39.116 20.771,41.218 20.771,49.304 20.547,49.527 20.48,49.527 20.223,49.784 v2(20.126,49.784)
pads on no net: J1. J1.A8 J1.B8 S1. U1.6 U3.4 U3.12 U3.25 U3.26 U3.55 U4A.4 U4B.4 U4C.4 U4D.4

## Polygon pours and split planes (outlines as drawn)
GND on Top Layer "GND_L01_P044" (solid, pour order 44): 10.287,36.83 10.541,37.084 11.43,37.084 11.811,36.703 13.066,34.502 13.016,33.869 11.303,33.909 11.303,30.099 10.517,30.099 10.136,30.48 10.287,30.631
GND on Top Layer "GND_L01_P042" (solid, pour order 42): 9.398,27.813 9.398,24.519 11.684,24.519 11.684,27.051 10.922,27.813
INC_P on Top Layer "INC_P_L01_P013" (solid, pour order 13): 52.467,24.26 52.234,24.32 52.055,24.5 51.936,24.619 51.961,24.5 51.19,25.042 51.157,25.398 51.19,30.988 54.8,30.988 55.372,30.416 55.372,29.4 55.245,29.4 55.245,25.4 56.325,24.32 56.769,24.32 57.15,23.939 57.15,18.605 56.896,18.351 56.896,14.034 56.769,13.906 54.991,13.906 54.864,14.034 54.864,17.335 54.483,17.716 53.848,17.716 53.594,17.462 53.594,14.16 53.34,13.906 51.816,13.906 51.562,14.16 51.562,18.351 52.451,19.241
INB_P on Top Layer "INB_P_L01_P012" (solid, pour order 12): 41.012,24.786 40.24,25.146 40.269,30.861 41.021,30.861 44.45,30.861 44.704,30.607 44.704,29.591 44.577,29.591 44.577,24.638 44.704,24.511 46.101,24.511 46.482,24.13 46.482,18.796 46.228,18.542 46.228,14.224 46.101,14.097 44.323,14.097 44.196,14.224 44.196,17.526 43.815,17.907 43.18,17.907 42.926,17.653 42.926,14.351 42.672,14.097 41.148,14.097 40.894,14.351 40.894,18.542 40.894,19.304 40.894,20.193 41.148,20.375 41.021,20.366
GND on Top Layer "GND_L01_P043" (solid, pour order 43): 12.319,31.75 12.319,30.48 11.557,29.718 9.525,29.718 9.525,30.226 9.779,30.48 11.303,30.48 11.43,30.607 11.43,31.623 11.557,31.75
GND on Top Layer "GND_L01_P038" (solid, remove dead copper, pour order 38): 22.412,5.016 22.369,4.208 22.412,2.601 21.717,1.978 21.717,0.746 21.162,0.735 20.527,1.371 20.139,1.978 19.79,2.673 19.239,2.659 18.018,2.629 16.902,2.601 16.486,2.944 16.43,3.44 16.486,4.328 16.43,5.016 16.039,5.455 14.983,5.663 10.434,5.881 9.396,5.769 9.017,6.477 9.017,25.654 11.938,25.654 11.938,24.003 12.065,23.876 14.478,23.876 14.478,27.178 14.732,27.432 14.732,38.227 15.367,38.862 19.431,38.862 21.717,36.576 21.717,33.401 22.733,32.385 25.908,32.385 27.94,30.353 27.94,22.987 28.448,22.987 28.448,22.86 28.702,22.606 28.702,19.939 28.702,10.033 28.702,9.398 28.321,9.017 26.227,9.017 26.158,8.762 25.802,8.294 25.499,7.958 25.226,7.718 25.235,7.175 25.146,6.477 24.899,6.327 24.765,5.792 24.656,5.606 24.481,5.545 24.291,5.38 23.308,5.343 22.428,5.31
GND on Top Layer "GND_L01_P039" (solid, remove dead copper, pour order 39): 25.654,1.016 25.781,1.016 39.243,1.016 39.751,1.524 39.751,17.526 39.243,18.034 35.433,18.034 34.925,18.542 35.179,18.796 35.179,34.29 36.83,35.941 36.723,36.322 36.723,36.596 36.514,37.722 36.449,63.246 35.179,64.516 32.512,64.516 31.623,65.405 31.623,66.167 30.226,67.564 29.591,67.564 29.591,69.088 28.702,69.977 0.127,69.977 0.127,0 0.254,0.127 21.209,0.127 21.209,0.381 19.177,2.413 16.764,2.413 16.256,2.921 16.256,4.826 15.621,5.461 9.017,5.461 8.382,6.096 8.382,38.354 9.271,39.243 20.066,39.243 20.066,39.116 22.225,36.957 22.225,33.401 22.987,32.639 26.67,32.639 28.575,30.734 28.575,24.384 29.083,23.876 29.083,20.828 28.956,20.701 28.956,10.287 28.956,9.144 28.575,8.763 26.67,8.763 25.527,7.322 25.389,7.322 25.273,6.096 24.384,5.207 22.733,5.207 22.733,2.54 21.971,1.778 21.971,1.016 22.098,0.889 25.527,0.889
NetC21_2 on Top Layer "NETC21_2_L01_P005" (solid, pour order 5): 20.193,29.591 20.193,27.813 21.59,26.416 21.59,22.479 21.844,22.225 24.892,22.225 25.527,22.86 25.527,26.924 23.368,29.083 22.225,29.083 22.225,29.21 21.844,29.591
INA_P on Top Layer "INA_P_L01_P035" (solid, pour order 35): 50.292,54.864 57.15,54.864 57.15,44.704 54.356,44.704 54.356,48.26 52.959,48.26 52.959,44.831 52.832,44.958 50.165,44.958
GND on Top Layer "NONET_L02_P-001" (solid, remove dead copper, pour order 30): 63.239,20.238 63.239,24.143 62.744,24.638 58.039,24.638 58.039,20.238
GND on Top Layer "NONET_L02_P-001" (solid, remove dead copper, pour order 29): 51.936,20.365 51.936,24.27 51.441,24.765 46.736,24.765 46.736,20.365
GND on Top Layer "NONET_L02_P-001" (solid, remove dead copper, pour order 28): 40.633,20.492 40.633,24.397 40.138,24.892 35.433,24.892 35.433,20.492
INB_N on Top Layer "INB_N_L01_P017" (solid, pour order 17): 40.054,10.033 40.689,10.033 42.848,10.033 42.848,6.223 44.372,6.223 44.372,10.033 47.166,10.033 47.166,0.127 40.054,0.127
IND_N on Top Layer "IND_N_L01_P016" (solid, pour order 16): 61.419,10.033 62.054,10.033 64.213,10.033 64.213,6.223 65.737,6.223 65.737,10.033 68.531,10.033 68.531,0.127 61.419,0.127
INC_N on Top Layer "INC_N_L01_P015" (solid, pour order 15): 50.673,10.033 51.308,10.033 53.467,10.033 53.467,6.223 54.991,6.223 54.991,10.033 57.785,10.033 57.785,0.127 50.673,0.127
IND_P on Top Layer "IND_P_L01_P014" (solid, pour order 14): 63.414,19.103 63.476,19.455 63.45,20.143 63.476,20.878 63.466,21.504 63.45,22.529 63.466,24.031 62.605,24.444 62.602,30.734 66.421,30.734 66.855,30.3 66.855,24.257 67.564,24.257 67.945,23.876 67.945,18.542 67.691,18.288 67.691,13.97 67.564,13.843 65.786,13.843 65.659,13.97 65.659,17.272 65.278,17.653 64.643,17.653 64.389,17.399 64.389,14.097 64.135,13.843 62.611,13.843 62.357,14.097 62.357,18.288 62.992,18.923
INA_N on Top Layer "INA_N_L01_P011" (solid, pour order 11): 54.482,41.656 57.531,41.656 70.104,41.656 70.104,31.496 69.596,30.988 61.341,30.988 61.341,33.147 56.769,33.147 56.769,31.369 49.403,31.369 49.403,32.766 46.482,32.766 46.101,32.385 46.101,31.115 37.369,31.115 37.369,42.037 50.038,42.037 50.292,41.783 51.816,41.783 53.086,40.513 53.086,36.83 54.482,36.83
INA_N on Top Layer "INA_N_L01_P010" (solid, pour order 10): 21.59,8.509 24.384,8.509 24.511,8.382 24.511,7.874 23.876,7.239 21.971,7.239 21.59,6.858 21.59,2.032 21.209,1.651 20.193,1.651 19.685,2.159 19.685,8.001 19.812,8.001 20.193,8.382
+3V3 on Top Layer "+3V3_L01_P009" (solid, pour order 9): 13.208,31.877 13.462,31.877 14.097,31.877 14.351,31.623 14.351,26.924 14.097,26.67 13.716,26.67 13.335,26.289 13.335,24.511 13.208,24.384 12.573,24.384 12.192,24.765 12.192,27.813 12.446,28.067 12.446,30.48 13.081,31.115 13.081,31.75
+5V on Top Layer "+5V_L01_P008" (solid, pour order 8): 14.224,34.29 13.97,34.036 13.462,34.036 12.7,34.901 12.7,34.798 12.7,38.354 13.208,38.862 18.923,38.862 19.05,38.735 19.05,37.719 18.923,37.592 18.034,37.592 17.653,37.973 14.478,37.973 14.224,37.719
+5V on Top Layer "+5V_L01_P007" (solid, pour order 7): 18.119,38.1 19.558,38.1 19.685,37.973 19.685,37.084 20.193,37.084 20.32,36.957 20.32,32.893 21.082,32.131 26.162,32.131 26.543,31.75 26.543,29.718 26.035,29.21 22.86,29.21 22.225,29.845 18.415,29.845 18.119,30.141
INA_N on Top Layer "INA_N_L01_P006" (solid, pour order 6): 19.431,27.051 20.701,27.051 21.59,26.162 21.59,21.971 22.606,20.955 24.257,20.955 24.511,20.701 24.511,20.32 24.257,20.066 20.193,20.066 19.304,20.955 19.304,26.67 19.431,26.797
NetC21_2 on Top Layer "NETC21_2_L01_P003" (solid, pour order 3): 24.511,19.431 25.908,20.828 26.543,20.828 26.543,18.669 26.035,18.161 24.886,18.161 24.886,18.167 24.511,18.542 22.987,18.542 22.987,19.431
GND on Bottom Layer "GND_L04_P047" (solid, remove dead copper, pour order 47): 36.507,40.513 36.449,63.246 35.179,64.516 32.512,64.516 31.623,65.405 31.623,66.167 30.226,67.564 29.591,67.564 29.591,69.088 28.702,69.977 0.127,69.977 0.127,0 0.254,0.127 21.209,0.127 21.209,0.381 19.177,2.413 16.764,2.413 16.256,2.921 16.256,4.826 15.621,5.461 9.017,5.461 8.382,6.096 8.382,38.354 10.541,40.513
GND on Bottom Layer "GND_L04_P045" (solid, remove dead copper, pour order 45): 22.412,5.016 22.369,4.208 22.412,2.601 21.717,1.978 21.717,0.746 21.162,0.735 20.527,1.371 20.139,1.978 19.79,2.673 19.239,2.659 18.018,2.629 16.902,2.601 16.486,2.944 16.43,3.44 16.486,4.328 16.43,5.016 16.039,5.455 14.983,5.663 10.434,5.881 9.396,5.769 9.017,6.477 9.017,25.654 11.938,25.654 11.938,24.003 12.065,23.876 14.478,23.876 14.478,27.178 14.732,27.432 14.732,38.227 15.367,38.862 19.431,38.862 23.297,34.996 25.865,34.996 35.842,35.009 35.788,33.635 28.056,33.635 27.261,32.94 26.598,32.119 26.611,31.682 27.94,30.41 27.94,22.987 28.448,22.987 28.448,22.86 28.702,22.606 28.702,19.939 28.702,10.033 28.702,9.398 28.321,9.017 26.227,9.017 26.158,8.762 25.802,8.294 25.499,7.958 25.226,7.718 25.235,7.175 25.146,6.477 24.899,6.327 24.765,5.792 24.656,5.606 24.481,5.545 24.291,5.38 23.308,5.343 22.428,5.31
IND_N on Bottom Layer "IND_N_L04_P033" (solid, pour order 33): 61.404,5.969 68.58,5.969 68.58,0.127 61.404,0.127
INC_N on Bottom Layer "INC_N_L04_P032" (solid, pour order 32): 50.736,5.969 57.721,5.969 57.721,0.127 50.736,0.127
INB_N on Bottom Layer "INB_N_L04_P031" (solid, pour order 31): 40.132,6.096 47.117,6.096 47.117,0.254 40.132,0.254
GND on Bottom Layer "GND_L04_P027" (solid, pour order 27): 50.165,54.864 56.896,54.864 57.023,54.991 57.277,54.737 57.277,41.91 70.231,41.91 70.104,41.783 70.104,30.988 68.834,30.988 68.834,36.068 63.066,36.068 62.611,35.613 62.611,24.13 62.611,18.669 57.023,18.669 57.023,27.94 56.896,28.067 56.896,36.322 50.546,36.322 50.927,35.941 50.927,18.669 46.609,18.669 46.609,36.322 40.259,36.322 40.005,36.068 40.005,18.669 35.56,18.669 35.56,36.322 36.957,37.719 36.957,42.164 50.165,42.164
IND_P on Bottom Layer "NONET_L02_P-001" (solid, remove dead copper, pour order 24): 62.838,18.607 62.838,27.807 68.692,27.807 68.692,18.607
INC_P on Bottom Layer "NONET_L02_P-001" (solid, remove dead copper, pour order 23): 51.127,21.132 51.127,27.932 56.727,27.932 56.727,18.732 51.127,18.732
INB_P on Bottom Layer "NONET_L02_P-001" (solid, remove dead copper, pour order 22): 40.541,21.165 40.541,27.965 46.256,27.965 46.256,18.765 40.541,18.765
INA_N on Bottom Layer "NONET_L02_P-001" (solid, remove dead copper, pour order 21): 68.465,28.067 62.865,28.067 62.865,35.867 68.465,35.867
INA_N on Bottom Layer "NONET_L02_P-001" (solid, remove dead copper, pour order 20): 56.654,28.194 51.054,28.194 51.054,35.994 56.654,35.994
INA_N on Bottom Layer "NONET_L02_P-001" (solid, remove dead copper, pour order 19): 46.24,28.194 40.64,28.194 40.64,35.994 46.24,35.994
NetC21_2 on Bottom Layer "NONET_L01_P-001" (solid, remove dead copper, pour order 2): 25.019,22.86 25.019,21.81 25.019,20.822 26.003,19.838 26.003,18.161 23.769,18.161 21.717,20.213 21.717,25.908 25.019,25.908
+3V3 on Power "+3V3_L03_P018" (solid, pour order 18): 12.192,26.289 12.319,26.416 13.081,26.416 13.208,26.162 13.208,26.035 13.208,24.257 13.081,24.257 12.954,24.13 12.319,24.13 12.319,24.257 12.192,24.384
GND on Bottom Solder "GND_L04_P034" (solid, pour order 34): 50.165,54.864 56.896,54.864 57.023,54.991 57.277,54.737 57.277,41.91 70.231,41.91 70.104,41.783 70.104,36.068 68.834,36.068 63.066,36.068 62.611,35.613 62.611,24.13 62.611,19.939 56.896,19.939 56.896,28.067 56.896,36.322 50.546,36.322 50.927,35.941 50.927,19.939 46.609,19.939 46.609,36.322 40.259,36.322 40.005,36.068 40.005,19.939 35.56,19.939 35.56,36.322 37.338,38.1 37.338,42.164 50.165,42.164
GND on Top Solder "NONET_L-01_P-001" (solid): 20.32,1.27 20.32,0.254 21.209,0.254 21.209,0.381
no net on Top Solder "NONET_L-01_P-001" (solid): 21.982,1.784 21.982,0.895 22.998,0.895 22.998,1.022
no net on Top Solder "NONET_L01_P037" (solid, pour order 37): 50.279,41.796 57.522,41.796 61.214,36.141 61.214,33.147 56.896,33.147 56.896,36.068 50.8,36.068 50.927,35.941 50.927,32.893 46.609,32.893 46.609,36.322 46.482,36.322
INA_P on Top Solder "INA_P_L01_P000" (solid, pour order 0): 50.292,54.864 57.15,54.864 57.15,44.704 54.356,44.704 54.356,48.26 52.959,48.26 52.959,44.831 52.832,44.958 50.165,44.958
GND on GND "GND_L02_P040" (solid, remove dead copper, pour order 40): 25.654,1.016 25.781,1.016 39.243,1.016 39.751,1.524 39.751,17.526 39.243,18.034 35.433,18.034 34.925,18.542 35.179,18.796 35.179,34.29 36.83,35.941 36.723,36.322 36.723,36.596 36.514,37.722 36.449,63.246 35.179,64.516 32.512,64.516 31.623,65.405 31.623,66.167 30.226,67.564 29.591,67.564 29.591,69.088 28.702,69.977 0.127,69.977 0.127,0 0.254,0.127 21.209,0.127 21.209,0.381 19.177,2.413 16.764,2.413 16.256,2.921 16.256,4.826 15.621,5.461 9.017,5.461 8.382,6.096 8.389,25.913 9.852,25.903 12.298,25.888 12.4,25.887 12.4,24.711 13.374,24.726 13.908,24.711 14.299,24.741 14.298,26.07 14.299,26.976 14.299,27.986 14.3,30.573 14.3,31.369 14.3,32.639 14.301,34.29 10.552,34.343 10.517,37.486 14.285,37.442 14.224,39.243 20.066,39.243 20.066,39.116 22.225,36.957 22.225,33.401 22.987,32.639 26.67,32.639 28.575,30.734 28.575,24.384 29.083,23.876 29.083,20.828 28.956,20.701 28.956,10.287 28.956,9.144 28.575,8.763 26.67,8.763 25.527,7.322 25.389,7.322 25.273,6.096 24.384,5.207 22.733,5.207 22.733,2.54 21.971,1.778 21.971,1.016 22.098,0.889 25.527,0.889
GND on GND "GND_L02_P041" (solid, remove dead copper, pour order 41): 22.412,5.016 22.369,4.208 22.412,2.601 21.717,1.978 21.717,0.746 21.162,0.735 20.527,1.371 20.139,1.978 19.79,2.673 19.239,2.659 18.018,2.629 16.902,2.601 16.486,2.944 16.43,3.44 16.486,4.328 16.43,5.016 16.039,5.455 14.983,5.663 10.434,5.881 9.396,5.769 9.017,6.477 9.017,25.654 11.938,25.654 11.938,24.003 12.065,23.876 14.478,23.876 14.478,27.178 14.489,27.189 14.489,34.412 10.776,34.498 10.679,34.538 10.702,37.336 14.668,37.239 14.732,38.227 15.367,38.862 19.431,38.862 21.717,36.576 21.717,33.401 22.733,32.385 25.908,32.385 27.94,30.353 27.94,22.987 28.448,22.987 28.448,22.86 28.702,22.606 28.702,19.939 28.702,10.033 28.702,9.398 28.321,9.017 26.227,9.017 26.158,8.762 25.802,8.294 25.499,7.958 25.226,7.718 25.235,7.175 25.146,6.477 24.899,6.327 24.765,5.792 24.656,5.606 24.481,5.545 24.291,5.38 23.308,5.343 22.428,5.31

## Keep-outs
Keep-Out Layer:
  circle w0.254: c3,3 r2.5
  lines w0.254: -0.043,3.166 -0.043,66.841 cw(c3.132,66.841) 3.132,70.016 ; -0.016,3.139 ccw(c3.159,3.139) 3.159,-0.036 66.766,-0.036 ; 3.179,70.002 34.13,70.002 cw(c34.129,66.889) 37.242,66.889 37.218,42.044 37.246,42.072 50.24,42.072 50.3,42.133 50.3,52.788 cw(c52.369,52.843) 52.314,54.911 55.027,54.906 cw(c55.076,52.784) 57.198,52.832 57.154,42.041 57.158,42.037 66.824,41.993 cw(c66.825,38.823) 69.994,38.825 ; 66.802,0 ccw(c66.827,3.165) 69.992,3.14 69.992,38.823 ; 69.994,38.825 69.994,38.825

## Silkscreen, mask and mechanical layers (free items; w line width, h text height)
Top Overlay:
  lines w0.254: 52.986,51.689 54.538,51.689 ; 53.762,50.8 53.762,51.689 53.762,52.578
Bottom Overlay:
  drawing of 430 lines, arcs and shapes, not listed
  text "TurboSpin V2.0" at 32.893,54.61 h4
  text "HALL_C /  / HALL_B /  / HALL_A /  / GND" at 5.334,50.292 h1.2
  text "Key Features: / MCU: STM32G431CBT6 / Interface: USB Type-C ,UART, DSHOT / Motor Type: BLDC/PMSM / Input Voltage: 2S–6S LiPo (7.4V–25.2V) / Max Currrent:: 40A" at 32.893,44.831 h1.52
  text "DSHOT /  / +3V3 /  / GND" at 5.334,39.116 h1.2
  text "SWDIO /  / GND /  / SWCLK /  / +3V3" at 5.334,26.035 h1.2
  text "TX /  / RX /  / GND /  / +3V3" at 5.08,12.7 h1.2
Top Solder:
  rectangle: 58.039,20.113 62.064,24.638
  rectangle: 46.833,20.275 50.858,24.8
  rectangle: 35.433,20.367 39.458,24.892
  region: 66.873,25.333 66.873,29.083 63.373,29.083 63.373,25.333
  region: 55.443,25.46 55.443,29.21 51.943,29.21 51.943,25.46
  region: 44.394,25.206 44.394,28.956 40.894,28.956 40.894,25.206